# Altium PCB Nibbler_PC.PcbDoc (part 2 of 2)
Units mm, origin at the board's own origin, x right, y up, seen from the top; angles counter-clockwise.
Board outline 160.02 x 119.89 mm, 2 copper layers (Top Layer, Bottom Layer); 63 components, 94 nets, 437 pads, 181 vias.
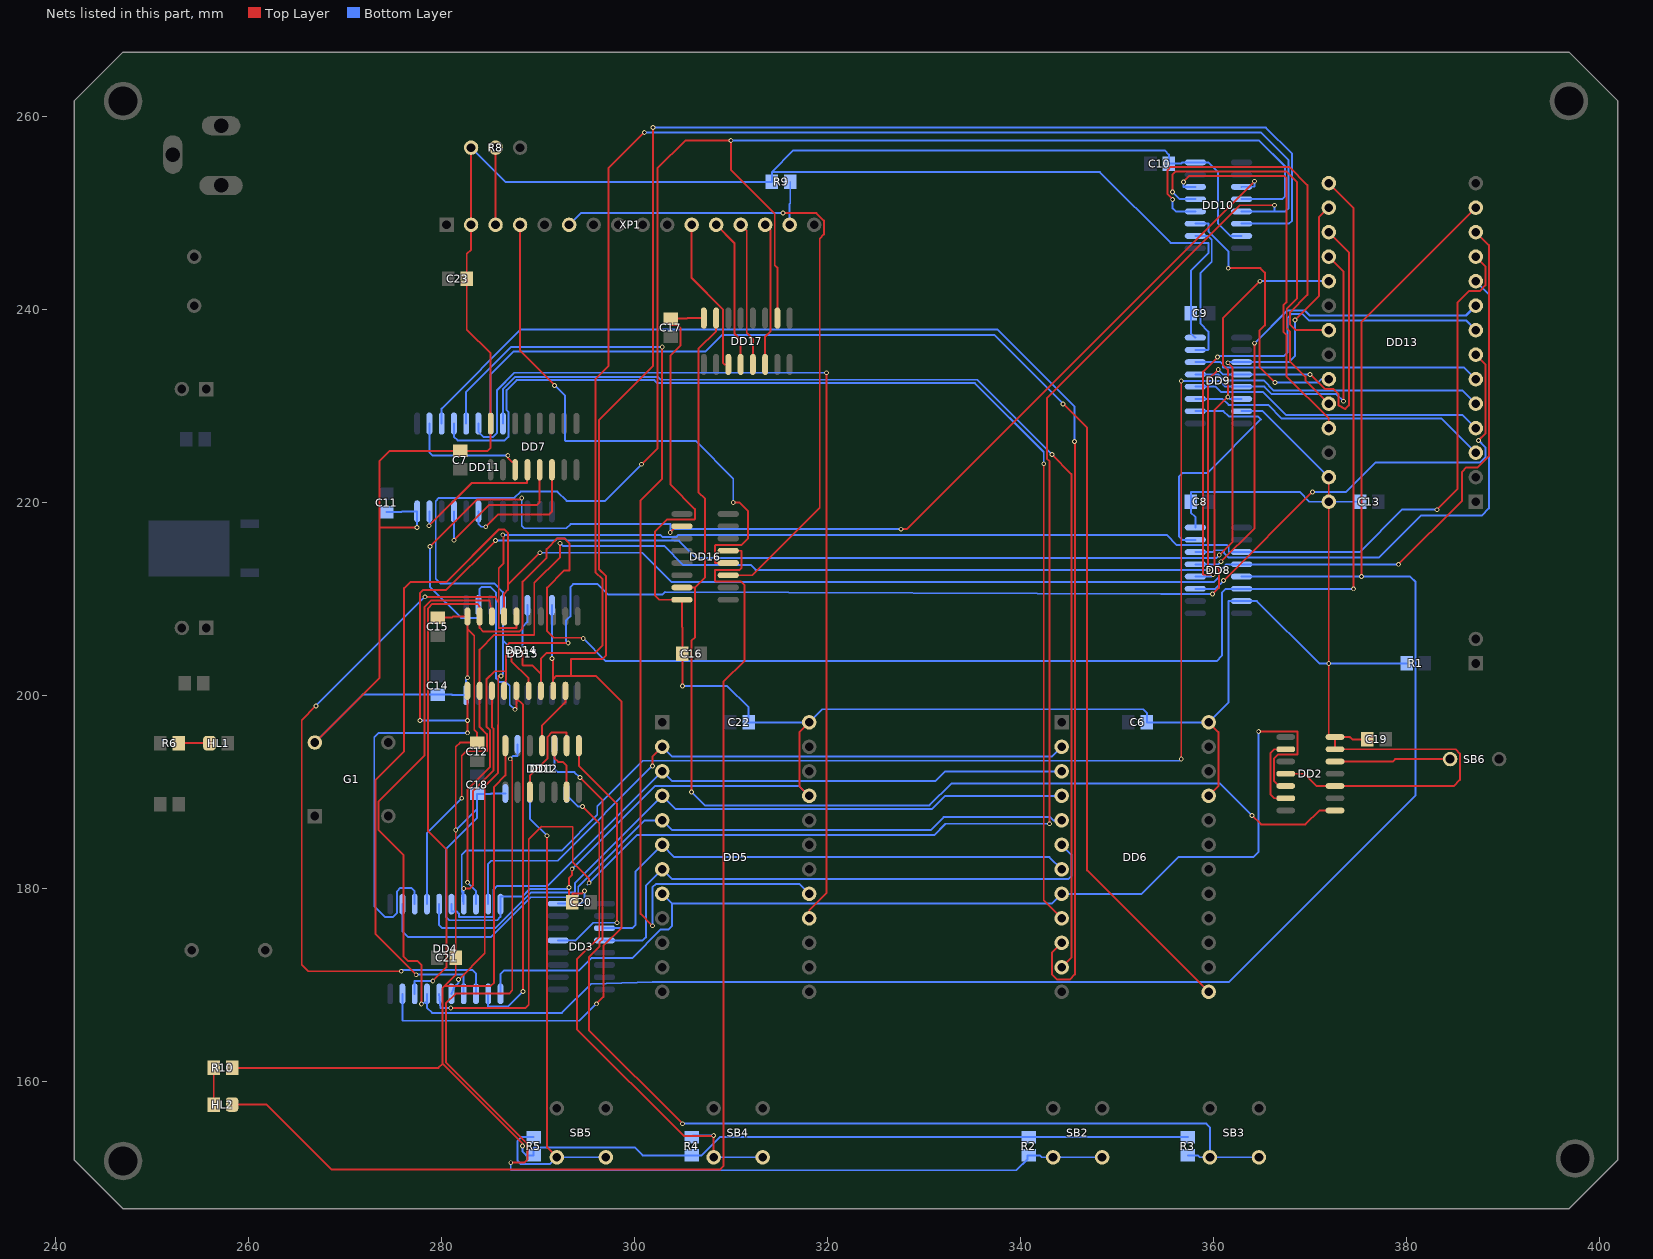
[diagram p2: the nets of this part, all layers, seen from the top]

## Via types
v1: diameter 0.5, hole 0.3, Top Layer to Bottom Layer, 181 vias

## Nets (pads, with @x,y where several pads share a name; then routed paths per layer and width w, separated by ;. In a path a pad name is that pad's centre, name@x,y a point inside that pad or via, vN(x,y) a via of type N, cw(c..) or ccw(c..) an arc to the next point about the centre after c; other vN are vias at no path point) (continued)
NetDD1_2: DD1.2 R2.1 SB2.3 SB2.4 | length 118.2
  Top Layer w0.2: v1(287.147,193.446) 287.35,193.243 287.35,169.443 287.02,169.113 281.491,169.113 280.475,168.097 280.475,161.98 288.925,153.53 288.925,151.905 288.608,151.587 v1(287.198,151.587)
  Bottom Layer w0.2: v1(287.147,193.446) 287.426,193.726 287.884,193.726 DD1.2@287.909,194.955 ; v1(287.198,151.587) 287.198,150.8 339.598,150.8 340.766,151.968 340.766,152.339 R2.1@340.868,152.339 342.036,152.339 342.229,152.146 SB2.3@343.408,152.146 SB2.4@348.488,152.146
NetDD1_5: DD1.5 R3.1 SB3.3 SB3.4 | length 112.4
  Top Layer w0.2: v1(294.361,191.516) 296.723,189.154 296.723,174.752 296.393,174.422 296.393,173.965 295.3,172.872 295.3,165.329 v1(305.003,155.626)
  Bottom Layer w0.2: DD1.5@291.719,194.955 291.719,192.405 292.049,192.075 293.802,192.075 v1(294.361,191.516) ; v1(305.003,155.626) 359.296,155.626 359.664,155.257 SB3.3@359.664,152.146 ; R3.1@357.378,152.339 358.419,152.339 358.612,152.146 SB3.3@359.664,152.146 ; SB3.4@364.744,152.146 SB3.3@359.664,152.146
NetDD1_9: DD1.9 R4.1 SB4.3 SB4.4 | length 55.3
  Top Layer w0.2: v1(294.627,188.506) 296.367,186.766 296.367,174.975 294.045,172.653 294.045,165.441 305.13,154.356 308.178,154.356 v1@308.229,154.305 ; SB4.3@308.229,152.146 v1@308.229,154.305 ; v1(308.229,154.396) v1@308.229,154.305
  Bottom Layer w0.2: DD1.9@292.989,189.855 292.989,189.662 294.145,188.506 v1(294.627,188.506) ; R4.1@306.1,154.396 v1(308.229,154.396) ; SB4.3@308.229,152.146 SB4.4@313.309,152.146
NetDD1_12: DD1.12 R5.1 SB5.3 SB5.4 | length 52.3
  Top Layer w0.2: v1(290.957,185.468) 290.957,153.162 SB5.3@291.973,152.146
  Bottom Layer w0.2: DD1.12@289.179,189.855 289.179,187.246 v1(290.957,185.468) ; R5.1@289.56,154.239 288.29,154.239 287.909,153.858 287.909,151.765 288.239,151.435 291.262,151.435 SB5.3@291.973,152.146 SB5.4@297.053,152.146
NetDD2_2: DD2.2 DD2.6 | length 7.8
  Top Layer w0.2: DD2.6@367.528,189.357 366.319,189.357 365.953,189.723 365.953,194.071 366.319,194.437 DD2.2@367.528,194.437
NetDD2_12: DD2.12 SB6.2 | length 12
  Top Layer w0.2: DD2.12@372.628,193.167 378.612,193.167 378.866,193.421 SB6.2@384.556,193.421
NetDD3_3: DD3.3 DD5.6 DD6.7 | length 55.3
  Bottom Layer w0.2: DD3.3@296.913,175.895 299.809,175.895 300.126,176.213 300.126,181.762 DD5.6@302.895,184.531 304.165,183.261 343.027,183.261 DD6.7@344.297,181.991
NetDD3_4: DD3.4 DD5.7 DD6.6 | length 58.8
  Bottom Layer w0.2: DD3.4@296.913,174.625 300.876,174.625 301.193,174.942 301.193,180.289 DD5.7@302.895,181.991 303.911,180.975 344.995,180.975 345.313,181.292 345.313,183.515 DD6.6@344.297,184.531
NetDD4_12: DD4.12 DD5.5 DD6.5 | length 78.1
  Bottom Layer w0.2: DD4.12@275.971,178.386 275.971,175.552 276.542,174.981 285.178,174.981 289.293,179.095 294.005,179.095 294.191,179.281 294.191,180.195 301.067,187.071 DD5.5@302.895,187.071 303.911,186.055 330.708,186.055 332.061,187.408 343.106,187.408 343.443,187.071 DD6.5@344.297,187.071
NetDD4_15: DD4.15 DD5.4 DD6.4 | length 74.2
  Bottom Layer w0.2: DD4.15@279.781,178.386 279.781,176.213 280.099,175.895 285.598,175.895 289.286,179.583 293.782,179.583 293.841,179.642 293.841,180.557 DD5.4@302.895,189.611 304.245,188.261 330.882,188.261 332.232,189.611 DD6.4@344.297,189.611
NetDD4_16: DD4.16 DD5.3 DD6.3 | length 73.2
  Bottom Layer w0.2: DD4.16@281.051,178.386 281.051,177.622 281.584,177.622 281.813,177.394 281.813,177.086 281.838,177.061 285.394,177.061 285.42,177.086 285.42,179.883 285.82,180.283 291.027,180.283 DD5.3@302.895,192.151 303.911,191.135 331.216,191.135 332.232,192.151 DD6.3@344.297,192.151
NetDD4_19: DD4.19 DD5.2 DD6.2 | length 70
  Top Layer w0.2: v1(301.879,192.71) 301.879,193.675 DD5.2@302.895,194.691
  Bottom Layer w0.2: DD4.19@284.861,178.386 284.861,182.562 285.178,182.88 292.049,182.88 v1(301.879,192.71) ; DD5.2@302.895,194.691 303.911,193.675 343.281,193.675 DD6.2@344.297,194.691
NetDD5_16: DD5.16 DD11.6 | length 99.8
  Top Layer w0.2: DD5.16@318.135,176.911 318.135,177.762 319.938,179.565 v1(319.938,233.46)
  Bottom Layer w0.2: DD11.6@283.845,228.197 283.845,227.355 284.403,226.797 285.344,226.797 285.775,227.228 285.775,231.673 287.562,233.46 v1(319.938,233.46)
NetDD5_17: DD5.17 DD11.5 | length 107.8
  Top Layer w0.2: v1(301.879,176.149) 300.66,177.368 300.66,220.243 302.895,222.479 v1(302.895,236.144)
  Bottom Layer w0.2: DD11.5@282.575,228.197 282.575,231.47 287.249,236.144 v1(302.895,236.144) ; v1(301.879,176.149) 301.879,180.111 302.26,180.492 317.094,180.492 DD5.17@318.135,179.451
NetDD6_9: DD6.9 DD11.4 | length 120.5
  Top Layer w0.2: v1(342.443,224.028) 342.443,178.765 DD6.9@344.297,176.911
  Bottom Layer w0.2: DD11.4@281.305,228.197 281.305,226.822 281.68,226.447 286.569,226.447 286.944,226.822 286.944,229.413 286.766,229.591 286.766,231.661 287.797,232.692 302.074,232.692 302.381,232.386 335.304,232.386 342.443,225.247 v1(342.443,224.028)
NetDD6_10: DD6.10 DD11.3 | length 139.2
  Top Layer w0.2: DD6.10@344.297,174.371 343.281,173.355 343.281,171.132 343.852,170.561 345.123,170.561 345.669,171.107 345.669,226.314 v1(345.643,226.339)
  Bottom Layer w0.2: DD11.3@280.035,228.197 280.035,229.743 288.239,237.947 337.617,237.947 345.643,229.921 v1(345.643,226.339)
NetDD6_11: DD6.11 DD11.8 | length 118.8
  Top Layer w0.2: v1(343.281,224.993) 345.313,222.961 345.313,172.847 DD6.11@344.297,171.831
  Bottom Layer w0.2: DD11.8@286.385,228.197 286.385,231.775 287.652,233.042 302.424,233.042 302.731,232.736 335.538,232.736 v1(343.281,224.993)
NetDD6_13: DD6.13 DD11.7 | length 136.3
  Top Layer w0.2: v1(344.449,230.226) 346.939,227.736 346.939,181.889 DD6.13@359.537,169.291
  Bottom Layer w0.2: DD11.7@285.115,228.197 285.115,233.299 287.46,235.644 307.373,235.644 309.118,237.388 337.287,237.388 v1(344.449,230.226)
NetDD7_3: DD7.3 DD11.2 | length 13.2
  Top Layer w0.2: v1(286.893,224.892) 286.893,224.65 287.337,224.206 287.655,224.206 DD7.3@287.655,223.406
  Bottom Layer w0.2: DD11.2@278.765,228.197 278.765,225.209 279.082,224.892 v1(286.893,224.892)
NetDD7_4: DD7.4 DD11.23 | length 14.9
  Top Layer w0.2: v1(278.714,217.602) 283.147,222.034 288.9,222.034 DD7.4@288.925,223.406
  Bottom Layer w0.2: v1(278.714,217.602) 278.765,217.653 DD11.23@278.765,219.097
NetDD7_5: DD7.5 DD11.21 | length 16.9
  Top Layer w0.2: v1(281.305,216.105) 284.935,219.735 289.877,219.735 290.195,220.053 DD7.5@290.195,223.406
  Bottom Layer w0.2: v1(281.305,216.105) DD11.21@281.305,219.097
NetDD7_6: DD7.6 DD11.19 | length 14
  Top Layer w0.2: v1(284.607,217.5) 285.864,218.757 291.147,218.757 291.465,219.075 DD7.6@291.465,223.406
  Bottom Layer w0.2: DD11.19@283.845,219.097 283.845,217.818 284.162,217.5 v1(284.607,217.5)
NetDD8_11: DD8.11 DD13.7 | length 47.3
  Top Layer w0.2: v1(361.086,211.912) v1(370.281,221.107) ; DD13.7@387.223,235.331 388.223,234.331 388.223,227.162 v1(387.502,226.441)
  Bottom Layer w0.2: DD8.11@358.153,211.066 360.24,211.066 v1(361.086,211.912) ; v1(370.281,221.107) 373.786,221.107 376.85,224.171 387.667,224.171 388.223,224.726 388.223,225.72 v1(387.502,226.441)
NetDD8_12: DD8.12 DD13.8 | length 57.5
  Top Layer w0.2: v1(359.969,212.522) 358.978,212.522 358.953,212.547 358.953,233.578 v1(360.451,235.077)
  Bottom Layer w0.2: DD8.12@358.153,212.336 359.783,212.336 v1(359.969,212.522) ; v1(360.451,235.077) 360.578,235.204 367.347,235.204 367.69,235.547 367.69,239.09 368.164,239.564 369.252,239.564 369.929,238.887 386.207,238.887 DD13.8@387.223,237.871
NetDD8_13: DD8.13 DD13.9 | length 51.8
  Top Layer w0.2: v1(360.807,213.881) 364.287,217.361 v1(364.287,236.525)
  Bottom Layer w0.2: DD8.13@358.153,213.606 360.532,213.606 v1(360.807,213.881) ; v1(364.287,236.525) 367.676,239.914 369.477,239.914 369.995,239.395 386.207,239.395 DD13.9@387.223,240.411
NetDD8_14: DD8.14 DD13.10 | length 57.2
  Bottom Layer w0.2: DD8.14@358.153,214.876 359.939,214.876 360.129,215.067 361.099,215.067 361.129,215.036 361.129,214.757 361.561,214.325 377.196,214.325 381.533,218.662 387.826,218.662 388.573,219.409 388.573,241.601 DD13.10@387.223,242.951
NetDD8_15: DD8.15 DD9.10 | length 26.1
  Bottom Layer w0.2: DD8.15@358.153,216.146 356.819,216.146 356.453,216.512 356.453,222.663 356.87,223.08 359.455,223.08 364.947,228.628 364.644,228.931 361.62,228.931 361.07,229.481 DD9.10@358.153,229.481
NetDD9_11: DD9.11 DD13.3 | length 31.4
  Bottom Layer w0.2: DD9.11@358.153,230.751 360.967,230.751 361.594,230.124 365.709,230.124 367.132,228.702 370.992,228.702 371.002,228.711 383.683,228.711 DD13.3@387.223,225.171
NetDD9_12: DD9.12 DD13.4 | length 30.9
  Bottom Layer w0.2: DD9.12@358.153,232.021 360.258,232.021 360.809,231.47 365.15,231.47 367.56,229.061 385.873,229.061 DD13.4@387.223,227.711
NetDD9_13: DD9.13 DD13.5 | length 30.3
  Bottom Layer w0.2: DD9.13@358.153,233.291 359.71,233.282 360.525,233.282 361.139,232.667 365.224,232.667 366.29,231.601 385.873,231.601 DD13.5@387.223,230.251
NetDD9_14: DD9.14 DD13.6 | length 30
  Bottom Layer w0.2: DD9.14@358.153,234.561 360.764,234.561 361.027,234.298 361.027,234.025 361.061,233.991 386.023,233.991 DD13.6@387.223,232.791
NetDD9_15: DD9.15 DD10.10 | length 15.5
  Bottom Layer w0.2: DD9.15@358.153,235.831 359.486,235.831 359.512,235.856 359.512,237.731 358.673,238.569 358.673,243.764 359.853,244.943 359.853,247.244 359.455,247.642 DD10.10@358.153,247.642
NetDD10_11: DD10.11 DD13.23 | length 28.8
  Top Layer w0.2: v1(361.569,244.297) 364.896,244.297 365.354,243.84 365.354,238.379 364.795,237.82 364.795,234.061 v1(366.42,232.435)
  Bottom Layer w0.2: DD10.11@358.153,248.912 359.512,248.912 359.536,248.888 359.536,248.078 361.569,246.045 v1(361.569,244.297) ; v1(366.42,232.435) 370.84,232.435 371.196,232.791 DD13.23@371.983,232.791
NetDD10_12: DD10.12 DD13.21 | length 41.5
  Top Layer w0.2: v1(355.803,251.435) 355.27,251.968 355.27,254.457 355.6,254.787 367.894,254.787 369.773,252.908 369.773,241.538 367.978,239.743 367.978,238.455 368.562,237.871 DD13.21@371.983,237.871
  Bottom Layer w0.2: v1(355.803,251.435) 355.803,250.507 356.129,250.182 DD10.12@358.153,250.182
NetDD10_13: DD10.13 DD13.24 | length 43.2
  Top Layer w0.2: v1(355.778,252.197) 355.778,254 356.095,254.317 367.603,254.317 368.681,253.24 368.681,241.146 367.628,240.093 367.628,238.075 367.945,237.758 367.945,234.678 369.567,233.056 369.567,232.667 DD13.24@371.983,230.251
  Bottom Layer w0.2: v1(355.778,252.197) 356.522,251.452 DD10.13@358.153,251.452
NetDD10_14: DD10.14 DD13.25 | length 40.8
  Top Layer w0.2: v1(356.921,253.247) 357.546,253.873 367.386,253.873 367.595,253.663 367.595,240.76 367.278,240.443 367.278,237.725 367.595,237.408 367.595,233.123 371.983,228.735 DD13.25@371.983,227.711
  Bottom Layer w0.2: v1(356.921,253.247) 356.921,252.747 356.946,252.722 DD10.14@358.153,252.722
NetDD12_3: DD12.3 DD12.9 | length 10
  Top Layer w0.2: DD12.3@289.179,190.005 289.179,191.697 291.008,193.526 291.008,195.732 291.465,196.19 292.964,196.19 292.989,196.164 DD12.9@292.989,194.805
NetDD12_6: DD12.6 DD12.10 | length 5.6
  Top Layer w0.2: DD12.10@291.719,194.805 291.719,193.523 292.109,193.134 292.578,193.134 292.989,192.722 DD12.6@292.989,190.005
NetDD12_11: DD12.11 DD15.9 | length 6.7
  Top Layer w0.2: DD12.11@290.449,194.805 290.449,196.915 292.862,199.328 DD15.9@292.862,200.493
NetDD16_3: DD16.3 XP1.6 | length 69.6
  Top Layer w0.2: DD16.3@309.74,212.471 312.208,212.471 319.227,219.49 319.227,247.371 319.659,247.802 319.659,249.237 318.884,250.012 v1(315.417,250.012)
  Bottom Layer w0.2: XP1.6@293.243,248.793 294.462,250.012 v1(315.417,250.012)
NetDD16_4: DD16.4 XP1.4 | length 57.5
  Top Layer w0.2: XP1.4@288.163,248.793 288.163,235.737 v1(291.744,232.156) ; DD16.4@309.74,213.741 308.407,213.741 308.381,213.766 308.381,215.544 308.432,215.595 311.099,215.595 311.802,216.298 311.802,219.122 310.922,220.002 v1(310.261,220.002)
  Bottom Layer w0.2: v1(291.744,232.156) 292.837,231.064 292.837,226.416 292.862,226.39 306.349,226.39 310.261,222.479 v1(310.261,220.002)
NetDD16_5: DD16.5 HL2.2 | length 125.3
  Top Layer w0.2: HL2.2@258.313,157.607 261.899,157.607 268.605,150.901 308.928,150.901 309.245,151.219 309.245,201.447 311.429,203.632 311.429,211.455 311.048,211.836 308.407,211.836 308.381,211.861 308.381,213.004 308.407,213.03 310.921,213.03 311.099,213.208 311.099,214.986 311.074,215.011 DD16.5@309.74,215.011
NetDD17_3: DD17.3 XP1.11 | length 16.3
  Top Layer w0.2: XP1.11@305.943,248.793 305.943,243.281 309.194,240.03 309.194,234.48 309.347,234.328 DD17.3@309.753,234.328
NetDD17_4: DD17.4 XP1.12 | length 15.5
  Top Layer w0.2: XP1.12@308.483,248.793 310.388,246.888 310.388,237.49 311.023,236.855 DD17.4@311.023,234.328
NetDD17_5: DD17.5 XP1.13 | length 15
  Top Layer w0.2: XP1.13@311.023,248.793 311.658,248.158 311.658,237.62 312.293,236.985 DD17.5@312.293,234.328
NetDD17_6: DD17.6 XP1.14 | length 14.9
  Top Layer w0.2: DD17.6@313.563,234.328 313.563,237.219 314.122,237.777 314.122,248.234 XP1.14@313.563,248.793
NetHL1_2: HL1.2 R6.1 | length 3.2
  Top Layer w0.2: R6.1@252.791,195.072 HL1.2@255.971,195.072
NetHL2_1: HL2.1 R10.2 | length 3.8
  Top Layer w0.2: HL2.1@256.413,157.607 R10.2@256.413,161.417
NetR8_2: R8.2 XP1.3 | length 8
  Top Layer w0.2: XP1.3@285.623,248.793 R8.2@285.623,256.794
NetR9_2: R9.2 XP1.15 | length 4.5
  Bottom Layer w0.2: XP1.15@316.103,248.793 316.103,250.977 316.164,251.038 R9.2@316.164,253.238
NZERO: DD3.13 DD12.8 | length 26.8
  Top Layer w0.2: DD12.8@294.259,194.805 294.259,192.735 298.196,188.798 v1(298.196,176.454)
  Bottom Layer w0.2: DD3.13@292.113,174.625 293.929,174.625 295.758,176.454 v1(298.196,176.454)
OP0: DD4.2 DD10.3 DD14.2 DD15.5 DD16.10 | length 177.3
  Top Layer w0.2: v1(278.841,215.468) 283.718,220.345 288.341,220.345 v1(288.341,220.472) ; v1(287.63,198.577) 287.782,198.73 DD15.5@287.782,199.746 ; DD15.5@287.782,200.493 DD15.5@287.782,199.746 ; v1(288.468,169.336) 288.468,199.06 DD15.5@287.782,199.746 ; v1(303.733,216.916) 304.368,217.551 DD16.10@304.94,217.551 ; v1(327.629,217.246) 328.219,217.246 v1(364.287,253.314)
  Bottom Layer w0.2: v1(278.841,215.468) 278.841,211.249 282.042,208.049 283.82,208.049 DD14.2@283.845,209.374 283.845,210.295 283.977,210.295 283.977,211.077 284.175,211.275 285.072,211.275 285.674,210.674 285.674,201.793 286.067,201.399 286.702,201.399 287.096,201.005 287.096,199.072 287.591,198.577 v1(287.63,198.577) ; DD4.2@284.861,169.086 284.861,167.786 284.886,167.761 286.893,167.761 v1(288.468,169.336) ; v1(288.341,220.472) 288.341,217.603 288.597,217.347 292.964,217.347 293.397,217.78 303.733,217.78 v1(303.733,216.916) 304.063,217.246 v1(327.629,217.246) ; DD10.3@362.953,252.722 364.287,252.747 v1(364.287,253.314)
OP1: DD4.5 DD10.4 DD14.4 DD15.6 DD17.10 | length 216.4
  Top Layer w0.2: v1(281.788,170.561) 284.505,173.279 284.505,190.627 285.877,191.999 285.902,202.019 v1(286.195,202.019) ; v1(287.274,204.826) 287.274,203.556 289.052,201.778 DD15.6@289.052,200.493 ; v1(300.761,223.977) 302.387,225.603 302.387,254.635 305.283,257.531 v1(310.007,257.531) 310.007,254.508 314.563,249.952 314.563,244.618 314.833,244.348 DD17.10@314.833,239.128
  Bottom Layer w0.2: DD4.5@281.051,169.086 281.381,169.85 281.788,170.256 v1(281.788,170.561) ; v1(286.195,202.019) 286.385,202.209 286.385,205.715 ; v1(287.274,204.826) 286.385,205.715 ; v1(300.761,223.977) 296.972,220.188 292.997,220.188 292.038,221.147 288.229,221.147 287.579,220.497 279.755,220.497 279.425,220.167 279.425,212.09 279.89,211.625 285.491,211.625 286.385,210.732 DD14.4@286.385,209.374 286.385,205.715 ; v1(310.007,257.531) 364.769,257.531 367.462,254.838 367.462,251.778 367.136,251.452 DD10.4@362.953,251.452
OP2: DD4.6 DD10.5 DD14.6 DD15.7 | length 319.2
  Top Layer w0.2: v1(280.975,167.615) 288.722,167.615 289.065,167.957 289.065,185.128 290.36,186.423 293.624,186.373 293.624,182.702 295.326,181 v1(295.326,180.594) ; v1(288.417,204.826) 288.417,203.157 288.442,203.132 289.438,203.132 290.322,202.248 ; DD15.7@290.322,200.493 290.322,202.248 ; v1(301.041,258.369) 297.307,254.635 297.307,234.137 295.961,232.791 295.961,212.801 296.716,212.045 296.716,205.2 295.935,204.419 290.932,204.419 290.322,203.81 290.322,202.248 ; v1(343.052,186.715) 343.052,224.282 342.773,224.561 342.773,230.822 362.775,250.825 v1(366.344,250.825)
  Bottom Layer w0.2: DD4.6@279.781,169.086 279.933,167.615 v1(280.975,167.615) ; v1(288.417,204.826) 288.417,207.131 288.925,207.639 DD14.6@288.925,209.374 ; 295.123,180.391 300.279,185.547 331.089,185.547 332.257,186.715 v1(343.052,186.715) ; v1(301.041,258.369) 364.947,258.369 367.817,255.499 367.817,250.507 367.492,250.182 DD10.5@362.953,250.182 ; 366.344,250.258 v1(366.344,250.825)
OP3: DD4.9 DD10.6 DD14.8 DD15.8 | length 215.8
  Top Layer w0.2: v1(291.465,203.835) 291.592,203.708 291.592,201.701 ; DD15.8@291.592,200.493 291.592,201.701 ; v1(296.069,168.053) 296.796,168.78 296.796,174.046 298.696,175.946 298.696,199.347 296,202.043 293.434,202.043 ; v1(301.955,258.877) 301.955,234.163 296.342,228.549 296.342,213.12 297.066,212.395 297.066,204.153 296.686,203.772 293.434,203.772 293.434,202.043 ; 291.592,201.701 291.934,202.043 293.434,202.043
  Bottom Layer w0.2: DD4.9@275.971,169.086 275.996,166.294 294.31,166.294 v1(296.069,168.053) ; v1(291.465,203.835) DD14.8@291.465,209.374 ; v1(301.955,258.877) 365.455,258.877 368.173,256.159 368.173,249.237 367.847,248.912 DD10.6@362.953,248.912
PHASE: DD2.5 DD4.1 DD5.8 DD6.8 | length 113.9
  Top Layer w0.2: v1(364.719,196.266) 368.732,196.266 368.757,196.24 368.757,193.904 368.732,193.878 366.712,193.878 366.303,193.469 366.303,191.176 366.852,190.627 DD2.5@367.528,190.627
  Bottom Layer w0.2: DD4.1@286.131,169.086 286.131,171.132 286.525,171.526 294.284,171.526 295.554,172.796 299.771,172.796 302.717,175.743 303.53,175.743 303.911,176.124 303.911,178.435 ; DD5.8@302.895,179.451 303.911,178.435 ; v1(364.719,196.266) 364.719,183.807 364.172,183.261 356.387,183.261 352.577,179.451 DD6.8@344.297,179.451 343.281,178.435 303.911,178.435
PRGBYTE0: DD4.3 DD8.3 DD13.11 DD15.16 | length 214.3
  Top Layer w0.2: v1(267.005,198.933) 265.532,197.46 265.532,172.123 266.23,171.425 v1(275.844,171.425) ; v1(278.308,210.236) 285.585,210.236 285.953,209.626 ; v1(286.372,216.662) 286.462,216.573 286.462,213.731 285.953,213.222 285.953,209.626 ; DD15.16@287.782,208.193 287.782,207.01 287.757,206.985 285.979,206.985 285.953,207.01 285.953,209.626 ; v1(383.188,219.266) 385.343,221.421 385.343,240.754 386.541,241.951 387.667,241.951 388.223,242.506 388.223,244.491 DD13.11@387.223,245.491
  Bottom Layer w0.2: v1(267.005,198.933) v1(278.308,210.236) ; v1(275.844,171.425) 275.996,171.577 283.21,171.577 283.591,171.196 DD4.3@283.591,169.086 ; v1(286.372,216.662) 286.387,216.647 302.709,216.647 302.94,216.416 304.335,216.416 304.581,216.662 355.168,216.662 356.235,215.595 361.457,215.595 361.616,215.436 361.616,214.905 361.645,214.876 DD8.3@362.953,214.876 375.175,214.876 379.565,219.266 v1(383.188,219.266)
PRGBYTE1: DD4.4 DD8.4 DD13.12 DD15.17 | length 207.7
  Top Layer w0.2: v1(277.393,171.069) 273.16,175.302 273.16,191.22 276.149,194.208 276.149,211.13 276.787,211.769 280.5,211.769 285.927,217.195 286.55,217.195 286.893,216.852 286.893,211.48 ; DD15.17@286.512,208.193 286.512,210.566 286.893,210.947 286.893,211.48 ; v1(290.22,214.808) 286.893,211.48 ; v1(379.2,213.606) 385.801,220.206 385.801,223.202 386.245,223.647 387.413,223.647 388.573,224.807 388.573,246.681 DD13.12@387.223,248.031
  Bottom Layer w0.2: v1(277.393,171.069) 282.296,171.069 282.321,171.044 DD4.4@282.321,169.086 ; v1(290.22,214.808) 300.822,214.808 303.844,211.785 360.113,211.785 360.579,212.251 360.579,212.819 361.366,213.606 DD8.4@362.953,213.606 v1(379.2,213.606)
PRGBYTE2: DD4.7 DD8.5 DD13.13 DD15.18 | length 251.8
  Top Layer w0.2: v1(277.927,168.021) 277.927,172.085 277.52,172.491 276.542,172.491 276.098,172.936 276.098,183.468 273.511,186.055 273.511,189.043 278.274,193.807 278.274,209.21 278.909,209.845 285.023,209.845 DD15.18@285.242,208.193 ; v1(375.365,212.336) 375.365,238.713 DD13.13@387.223,250.571
  Bottom Layer w0.2: v1(277.927,168.021) DD4.7@278.511,168.3 ; DD4.7@278.511,169.086 DD4.7@278.511,168.3 ; DD8.5@362.953,212.336 v1(375.365,212.336) 380.411,212.336 380.975,211.772 380.975,189.649 361.632,170.307 301.904,170.307 295.504,170.104 292.506,167.107 279.044,167.107 278.511,167.64 DD4.7@278.511,168.3
PRGBYTE3: DD4.8 DD8.6 DD13.15 DD15.19 | length 213.4
  Top Layer w0.2: v1(279.121,170.434) 280.518,171.831 280.518,184.048 278.624,185.942 278.624,209.054 279.066,209.495 283.71,209.495 283.972,209.232 DD15.19@283.972,208.193 283.972,207.01 284.347,206.635 288.061,206.635 288.417,206.99 288.417,211.811 290.904,214.297 290.904,215.174 292.016,216.286 292.748,216.286 293.295,215.738 293.295,212.974 293.268,212.947 292.712,212.947 290.957,211.192 290.957,206.692 291.657,205.993 294.641,205.993 v1(294.716,205.918) ; DD13.15@371.983,253.111 374.561,250.533 v1(374.561,211.066)
  Bottom Layer w0.2: DD4.8@277.241,169.086 277.241,170.409 v1(279.121,170.434) ; v1(294.716,205.918) 297.053,203.581 360.363,203.581 360.909,204.127 360.909,210.66 361.315,211.066 DD8.6@362.953,211.066 v1(374.561,211.066)
PRGBYTE4: DD4.13 DD9.3 DD13.16 DD15.1 | length 189.5
  Top Layer w0.2: v1(277.774,197.409) 277.774,210.601 278.13,210.957 280.514,210.957 v1(285.623,216.066) ; v1(282.702,196.139) v1(282.702,197.409) DD15.1@282.702,200.493 ; v1(360.629,214.566) 362.026,215.963 362.026,233.985 v1(361.518,234.493) ; v1(368.478,238.925) 370.967,241.414 370.967,249.555 DD13.16@371.983,250.571
  Bottom Layer w0.2: DD4.13@277.241,178.386 277.241,179.705 276.885,180.061 275.768,180.061 275.412,179.705 275.412,177.482 274.968,177.038 274.168,177.038 273.05,178.156 273.05,195.682 273.507,196.139 v1(282.702,196.139) ; v1(277.774,197.409) v1(282.702,197.409) ; v1(285.623,216.066) 291.816,216.066 292.036,216.286 292.816,216.286 293.036,216.066 304.632,216.066 306.449,214.249 360.312,214.249 v1(360.629,214.566) ; v1(361.518,234.493) 361.586,234.561 DD9.3@362.953,234.561 367.86,234.561 368.478,235.179 v1(368.478,238.925)
PRGBYTE5: DD4.14 DD9.4 DD13.17 DD15.2 | length 171.7
  Top Layer w0.2: v1(282.118,189.357) 282.118,193.776 282.575,194.233 284.692,194.233 284.718,194.259 284.718,195.998 283.972,196.744 DD15.2@283.972,200.493 283.972,204.775 285.482,206.285 289.593,206.285 289.632,206.324 289.632,211.673 292.316,214.357 v1(292.316,215.786) ; v1(359.461,213.03) 359.461,232.715 v1(360.528,233.782) ; v1(370.053,233.291) 371.564,231.78 372.47,231.78 373.012,231.238 373.012,230.073 373.697,229.705 374.066,230.073 374.066,245.948 DD13.17@371.983,248.031
  Bottom Layer w0.2: DD4.14@278.511,178.386 278.511,185.75 v1(282.118,189.357) ; v1(292.316,215.786) 292.594,215.508 303.084,215.508 305.074,213.517 312.099,213.517 312.587,213.03 v1(359.461,213.03) ; v1(360.528,233.782) 361.018,233.291 DD9.4@362.953,233.291 v1(370.053,233.291)
PRGBYTE6: DD4.17 DD9.5 DD13.18 DD15.3 | length 180.7
  Top Layer w0.2: v1(282.321,179.997) 282.943,179.997 283.286,180.34 283.286,190.121 285.418,192.252 285.418,196.557 285.242,196.733 DD15.3@285.242,200.493 ; v1(356.692,193.421) v1(356.692,232.613) ; DD13.18@371.983,245.491 373.52,243.954 v1(373.52,230.505)
  Bottom Layer w0.2: v1(282.321,179.997) DD4.17@282.321,178.386 282.118,179.808 282.118,183.515 282.537,183.934 292.467,183.934 296.159,187.626 296.159,188.514 300.888,193.243 356.514,193.243 v1(356.692,193.421) ; v1(356.692,232.613) 360.647,232.613 361.239,232.021 DD9.5@362.953,232.021 365.3,232.021 366.07,231.251 372.774,231.251 v1(373.52,230.505)
PRGBYTE7: DD4.18 DD9.6 DD13.19 DD15.4 | length 155.6
  Top Layer w0.2: v1(282.702,180.645) 282.702,190.242 285.068,192.608 285.068,196.383 284.683,196.768 284.683,201.676 285.526,202.519 286.695,202.519 ; DD15.4@286.512,200.493 286.695,201.701 286.695,202.519 ; v1(293.149,205.448) 287.02,205.448 286.695,205.122 286.695,202.519 ; v1(359.931,210.515) 360.586,211.171 360.586,213.071 360.129,213.529 360.129,229.573 v1(361.518,230.962) 361.518,233.782 361.01,234.29 361.01,239.116 v1(364.846,242.951)
  Bottom Layer w0.2: v1(282.702,180.645) 283.591,179.756 DD4.18@283.591,178.386 ; v1(293.149,205.448) 292.921,205.676 292.921,207.756 293.37,208.205 293.37,211.247 293.668,211.545 296.216,211.545 297.302,210.46 302.908,210.46 303.166,210.718 354.609,210.515 v1(359.931,210.515) ; v1(361.518,230.962) 361.729,230.751 DD9.6@362.953,230.751 ; v1(364.846,242.951) DD13.19@371.983,242.951
RESET: DD2.8 DD16.15 DD17.15 | length 124.1
  Top Layer w0.2: v1(305.918,190.017) 305.918,205.689 306.299,206.07 306.299,211.176 ; DD17.15@308.483,239.128 308.483,237.769 306.64,235.926 306.64,221.096 307.34,220.396 307.34,212.242 306.286,211.188 ; v1(364.02,187.579) 364.96,186.639 369.57,186.639 371.018,188.087 DD2.8@372.628,188.087 ; 306.286,211.188 306.273,211.201 DD16.15@304.94,211.201 306.299,211.176 ; 306.286,211.188 306.299,211.176
  Bottom Layer w0.2: v1(305.918,190.017) 307.324,188.611 330.597,188.611 332.867,190.881 360.718,190.881 v1(364.02,187.579)
VCC: C6.1 C7.1 C8.1 C9.1 C10.1 C11.1 C12.1 C13.1 C14.1 C15.1 C16.1 C17.1 C18.1 C19.1 C20.1 C21.1 C22.1 C23.1 DD1.14 DD2.4 DD2.10 DD2.13 DD2.14 DD3.16 DD4.20 DD5.21 DD5.24 DD6.21 DD6.24 DD7.16 DD8.7 DD8.16 DD9.7 DD9.16 DD10.7 DD10.16 DD11.24 DD12.14 DD13.27 DD13.28 DD14.20 DD15.20 DD16.16 DD17.16 G1.8 R1.2 R2.2 R3.2 R4.2 R5.2 R8.3 R9.1 R10.1 XP1.2 | length 782.6
  Top Layer w0.2: R10.1@258.313,161.417 279.707,161.417 280.125,161.835 ; G1.8@266.89,195.135 273.609,201.854 273.609,217.424 ; v1(277.495,217.424) 273.609,217.424 ; C15.1@279.654,208.087 281.102,208.087 281.208,208.193 DD15.20@282.702,208.193 282.702,206.934 ; 280.383,169.901 285.115,169.901 285.471,170.256 285.471,190.551 286.639,191.719 DD12.14@286.639,194.805 ; v1(282.702,201.854) 282.702,206.934 ; R8.3@283.083,256.794 XP1.2@283.083,248.793 283.083,246.217 282.636,245.77 C23.1@282.636,243.205 282.636,237.937 285.115,235.458 DD7.16@285.115,228.206 285.115,225.677 284.798,225.359 C7.1@281.94,225.359 274.635,225.359 273.609,224.333 273.609,217.424 ; v1(288.417,153.314) 288.417,153.543 280.125,161.835 ; v1(293.563,182.044) 293.563,181.422 293.245,181.104 v1(293.245,180.111) 293.245,178.879 C20.1@293.563,178.562 293.588,179.476 294.572,179.476 v1(294.826,179.73) ; v1(304.993,200.99) C16.1@304.993,204.343 304.993,207.086 304.94,207.139 DD16.16@304.94,209.931 302.577,209.931 302.158,210.35 302.158,217.018 303.403,218.262 306.265,218.262 306.29,218.288 306.29,219.329 303.759,221.86 303.759,235.267 304.8,236.309 304.8,238.087 304.483,238.404 303.797,238.404 303.784,238.417 C17.1@303.784,239.075 305.46,239.075 305.513,239.128 DD17.16@307.213,239.128 ; DD5.21@318.135,189.611 317.119,190.627 317.119,196.215 DD5.24@318.135,197.231 ; DD6.21@359.537,189.611 360.553,190.627 360.553,196.215 DD6.24@359.537,197.231 ; DD2.4@367.528,191.897 369.443,191.897 370.713,190.627 DD2.10@372.628,190.627 384.937,190.627 385.572,191.262 385.572,193.992 385.127,194.437 DD2.13@372.628,194.437 DD2.14@372.628,195.707 ; DD13.27@371.983,222.631 DD13.28@371.983,220.091 v1(371.983,203.327) 371.983,195.707 DD2.14@372.628,195.707 ; C19.1@375.986,195.453 374.421,195.453 374.167,195.707 DD2.14@372.628,195.707 ; 280.125,161.835 280.125,169.693 281.493,171.061 C21.1@281.493,172.847 v1(281.493,186.053) 281.493,194.686 281.94,195.133 C12.1@283.718,195.133 283.718,196.139 283.413,196.444 283.413,206.223 282.702,206.934
  Bottom Layer w0.2: G1.8@266.89,195.135 271.846,200.091 C14.1@279.654,200.091 281.102,200.091 281.119,200.074 DD14.20@282.575,200.074 282.575,201.727 v1(282.702,201.854) ; C11.1@274.32,219.014 275.844,219.014 275.927,219.097 DD11.24@277.495,219.097 v1(277.495,217.424) ; v1(281.493,186.053) 283.718,188.278 ; R8.3@283.083,256.794 286.639,253.238 R9.1@314.264,253.238 314.264,254.254 ; DD1.14@286.639,189.855 285.191,189.855 285.14,189.804 C18.1@283.718,189.804 283.718,188.278 ; v1(288.417,153.314) 288.417,152.718 288.796,152.339 R5.2@289.56,152.339 289.56,153.137 289.585,153.162 300.05,153.162 300.873,152.339 R4.2@305.943,152.339 306.984,152.339 308.884,154.239 R2.2@340.868,154.239 R3.2@357.378,154.239 ; DD3.16@292.113,178.435 294.508,178.435 294.826,178.752 v1(294.826,179.73) ; v1(293.245,180.111) 293.067,179.933 289.141,179.933 288.379,179.172 286.131,179.172 DD4.20@286.131,178.386 286.131,177.063 285.779,176.711 280.819,176.711 280.467,177.063 280.467,184.071 283.718,187.322 283.718,188.278 ; v1(293.563,182.044) 302.146,190.627 317.119,190.627 DD5.21@318.135,189.611 ; v1(304.993,200.99) 309.639,200.99 311.846,198.783 C22.1@311.846,197.231 DD5.24@318.135,197.231 319.485,198.581 352.762,198.581 353.121,198.222 C6.1@353.121,197.231 DD6.24@359.537,197.231 361.569,199.263 361.569,209.771 361.594,209.796 DD8.7@362.953,209.796 364.541,209.796 371.01,203.327 v1(371.983,203.327) R1.2@380.05,203.327 ; DD8.16@358.153,217.416 358.153,218.516 357.698,218.971 C8.1@357.698,220.083 357.698,221.082 357.723,221.107 368.96,221.107 369.976,220.091 DD13.28@371.983,220.091 C13.1@375.224,220.091 ; DD9.16@358.153,237.101 357.698,237.556 C9.1@357.698,239.641 357.698,244.042 359.503,245.847 359.503,246.888 359.469,246.922 355.6,246.922 348.268,254.254 314.264,254.254 ; DD9.7@362.953,229.481 365.133,229.481 DD13.27@371.983,222.631 ; DD10.7@362.953,247.642 361.779,247.642 360.514,248.907 360.514,254.234 359.486,255.262 DD10.16@358.153,255.262 356.819,255.262 356.692,255.135 C10.1@355.407,255.135 355.407,256.073 354.965,256.515 316.499,256.515 314.264,254.254
pads on no net: DD3.5 DD3.6 DD10.15 DD11.14 DD11.15 DD11.17 DD13.1 DD13.26 G1.1 XP1.7 XP1.8 XP1.9 XP1.10

## Silkscreen, mask and mechanical layers (free items; w line width, h text height)
Mechanical 1:
  lines w0.1: 272.923,216.408 352.933,216.408 352.933,251.968 272.923,251.968 272.923,216.408
Mechanical 15:
  lines w0.1: 241.935,151.892 241.935,261.62 247.015,266.7 396.875,266.7 401.955,261.62 401.955,151.892 396.875,146.812 247.015,146.812 241.935,151.892 ; 247.015,261.62 247.015,261.62